# Altium PCB lipo battery.PcbDoc
Units mil, origin at the board's own origin, x right, y up, seen from the top; angles counter-clockwise.
Board outline 2000 x 2294.35 mil, 2 copper layers (Top Layer, Bottom Layer); 22 components, 10 nets, 56 pads, 11 vias.
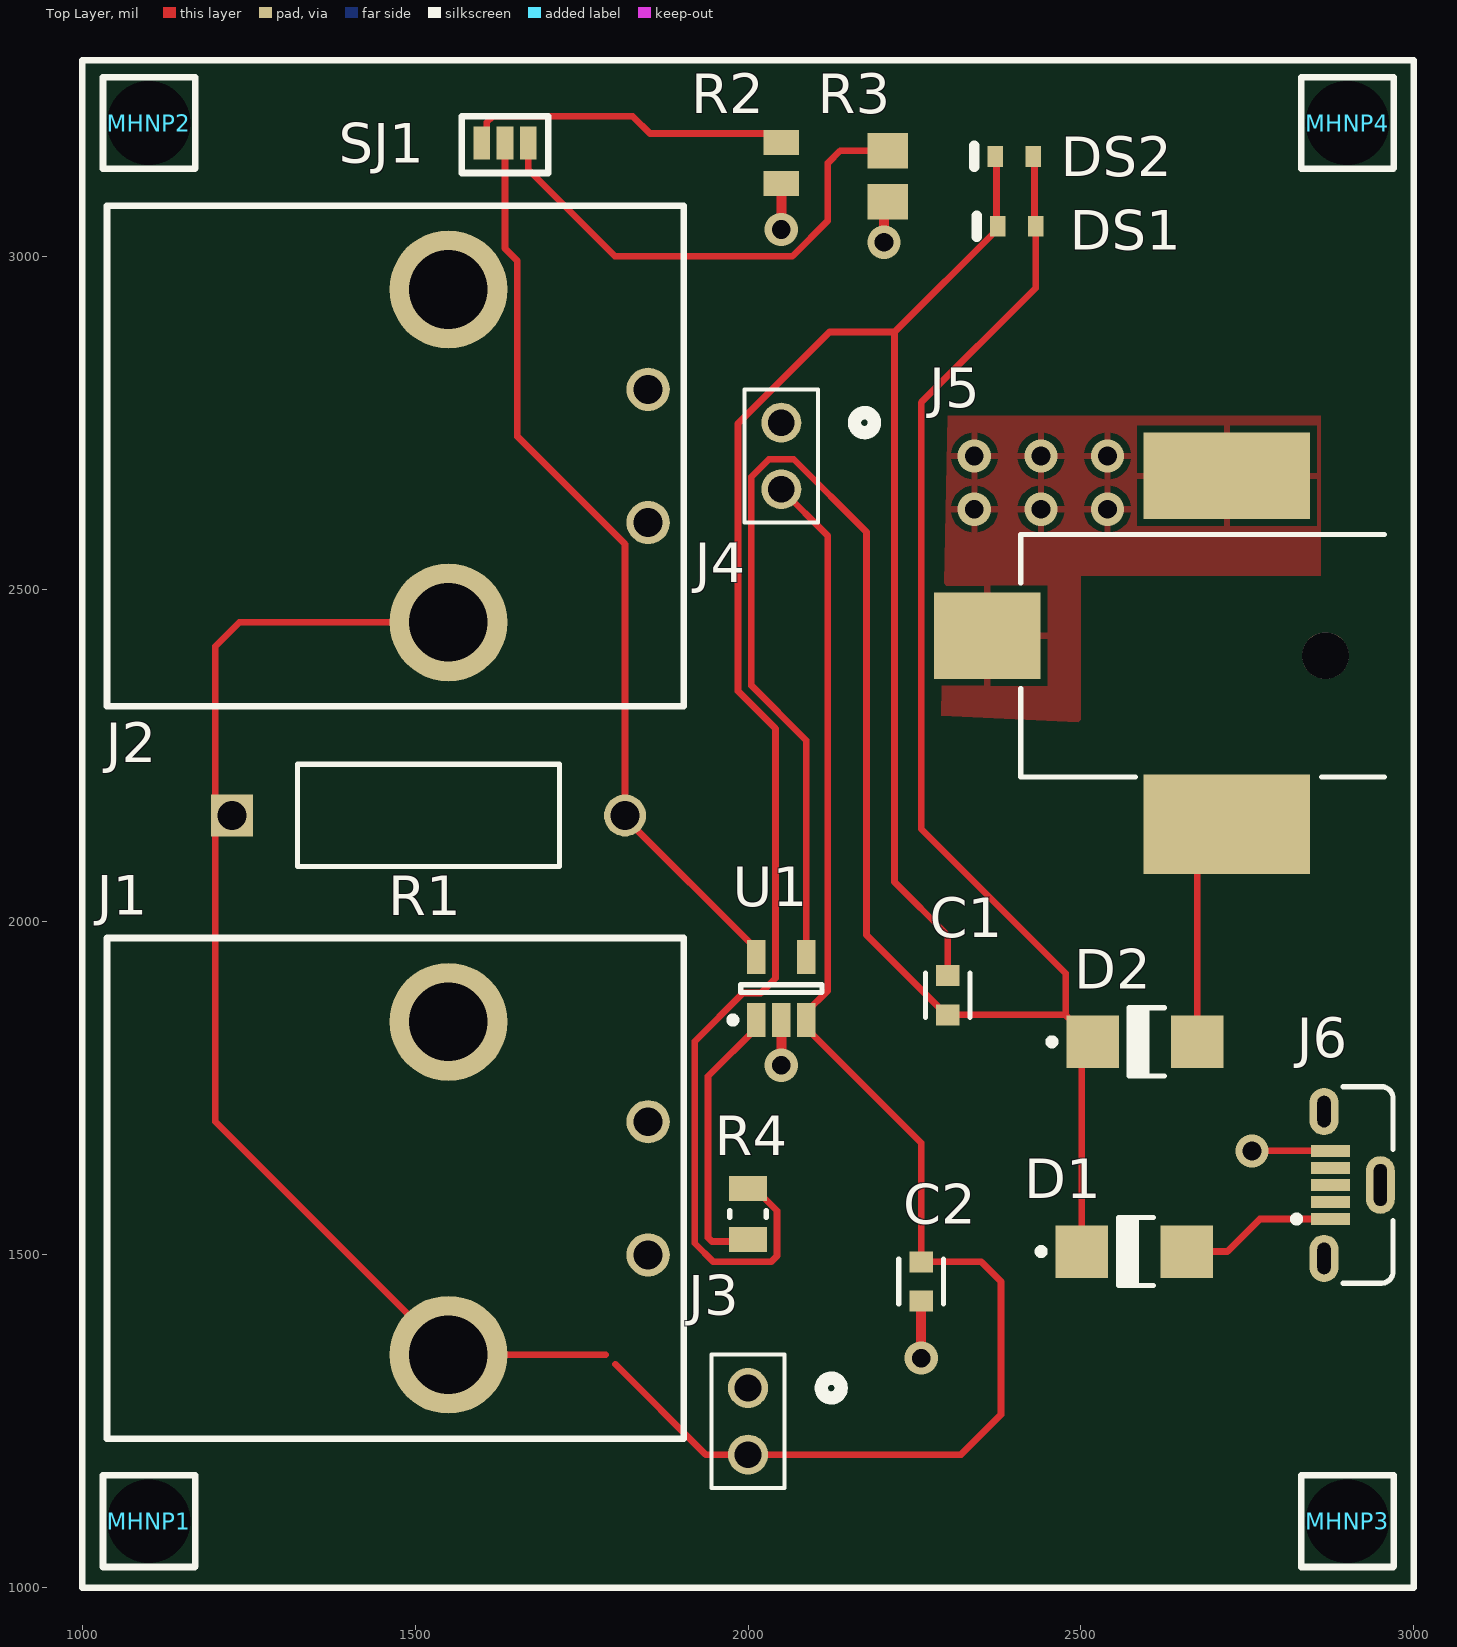
[diagram p0: Top Layer view]
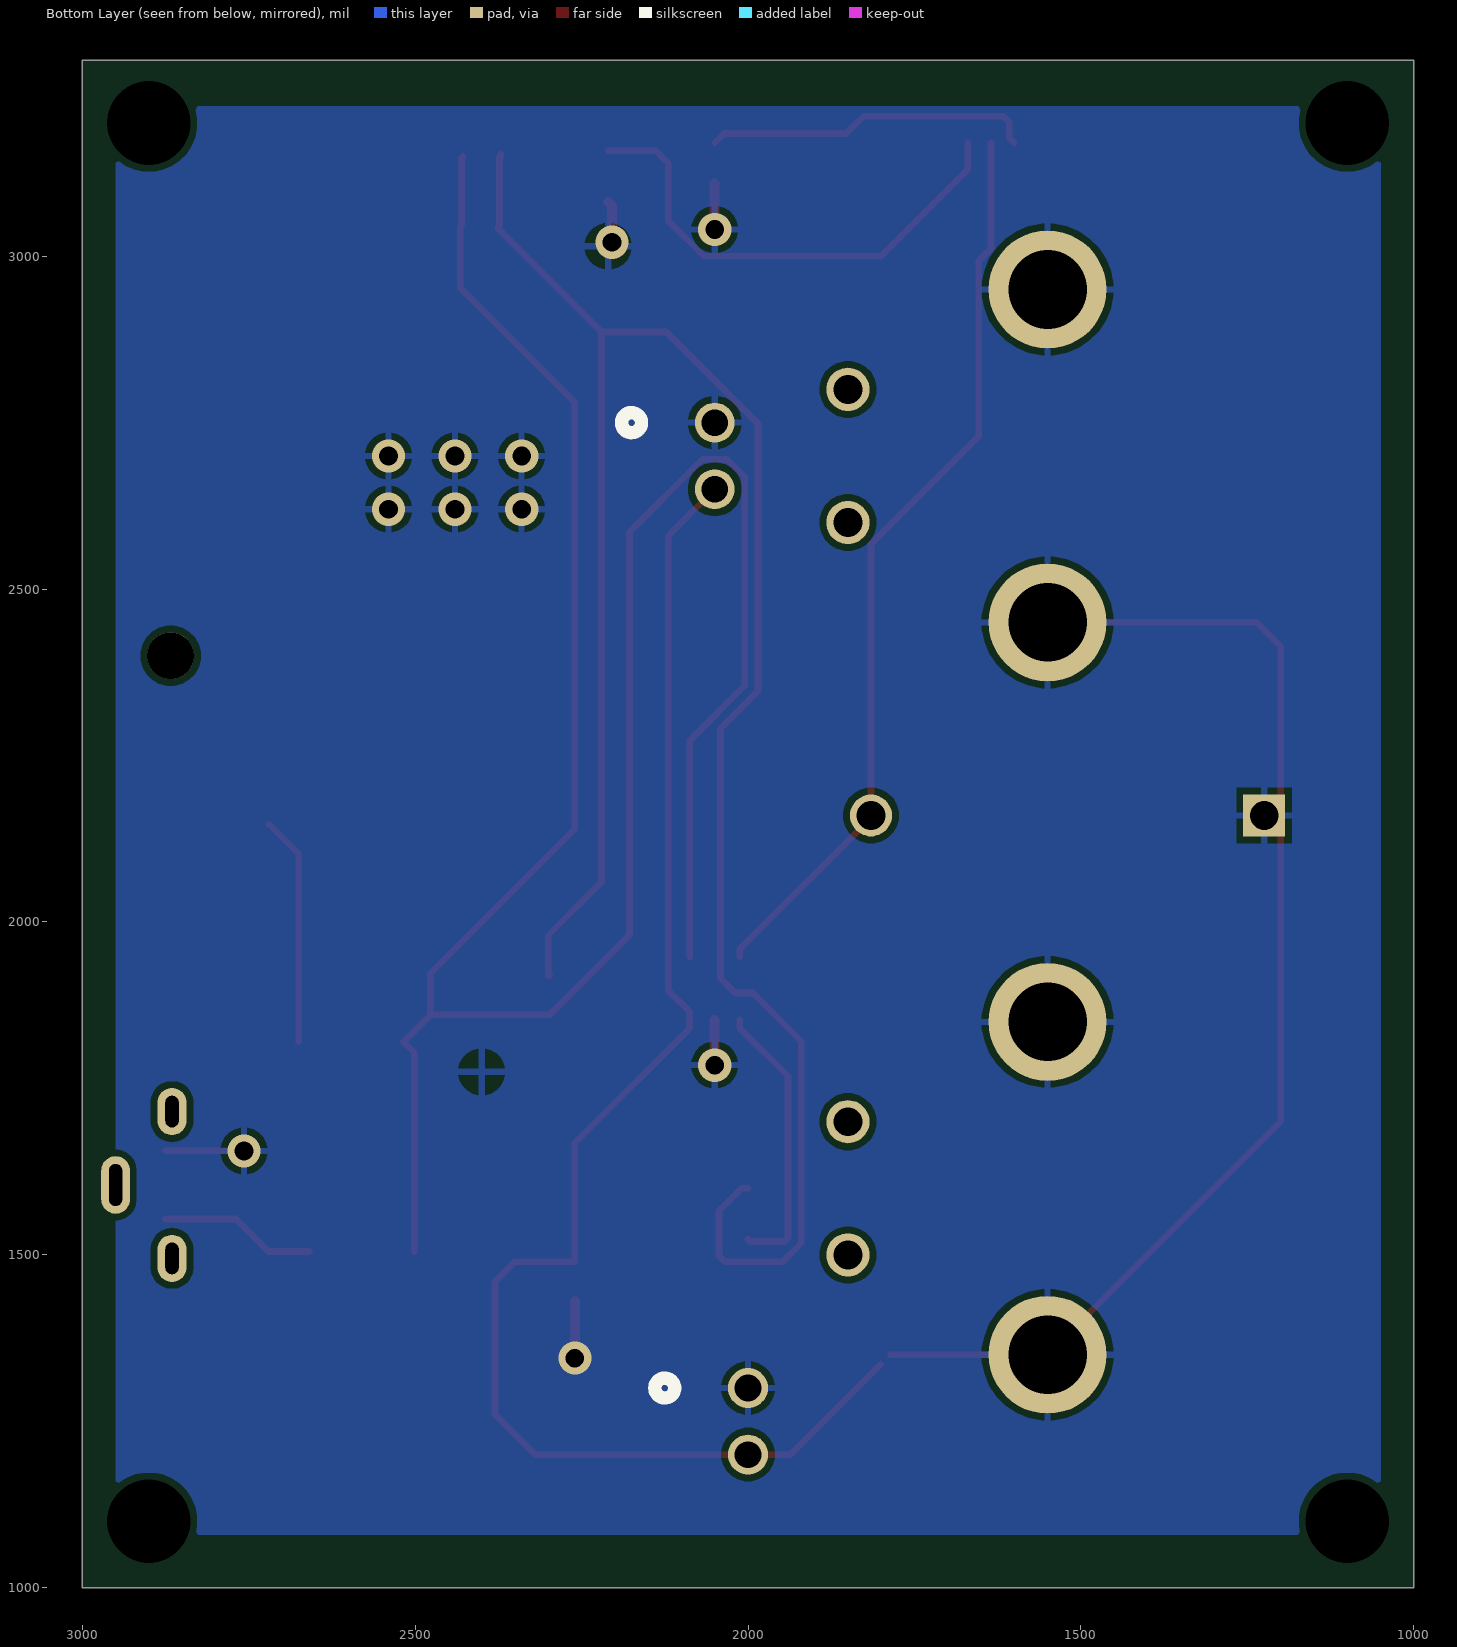
[diagram p1: Bottom Layer view, seen from below]

## Layer stack, top to bottom
Top Solder: solder mask 0.4, Solder Resist, Dk 3.5
Top Layer: signal copper 1.4
Dielectric 1: dielectric 12.6, FR-4, Dk 4.8
Bottom Layer: signal copper 1.4
Bottom Solder: solder mask 0.4, Solder Resist, Dk 3.5

## Board outline
1000,1000 1000,3294.35 3000,3294.35 3000,1000

## Design rules (kind name [scope] priority, off if disabled: settings)
Clearance [All] p1: gap=10 ignorepadtopadclearanceinfootprint=TRUE except(0: Arc-Hole Track-Hole SMDPad-Hole THPad-Hole Via-Hole Fill-Hole Poly-Hole Region-Hole Text-Hole)
PolygonConnect [All] p1: connectstyle=Relief reliefconductorwidth=10 reliefentries=4 polygonreliefangle="90 Angle" airgapwidth=10
RoutingVias [All] p1: holewidth=28 width=50 viastyle="Through Hole" minholewidth=28 minwidth=50 maxholewidth=28 maxwidth=50
SolderMaskExpansion [All] p1: expansion=4 istentingtop=FALSE
Width [All] p1: maxlimit=40 minlimit=10 preferedwidth=10
30 further rules are at their usual default settings.

## Classes and differential pairs
component class "lipo battery": C1 C2 D1 D2 DS1 DS2 J4 J5 J6 MHNP1 MHNP2 R2 R3 R4 SJ1 U1

## Components (designator, comment, footprint, x,y, rotation, side; value= is the part's Value field where it differs from the comment)
C1 "4.7uF" FP-CC0603-DA-MFG 2300,1890 r90 top value="4.7 uF"
C2 "4.7uF" FP-CC0603-DA-MFG 2260,1460 r270 top value="4.7 uF"
D1 "40V,1A" ONSC-SMA-2-403D-02_V 2580,1505 r0 top
D2 "40V,1A" ONSC-SMA-2-403D-02_V 2596.26,1820 r0 top
DS1 "RED" VISH-TLMS1000_V 2403.54,3045 r180 top
DS2 "RED" VISH-TLMS1000_V 2400,3150 r180 top
J1 "CONN HEADER R/A 2POS 5.08MM" 1-179276-2 1550,1850 r270 top locked (schematic designator J6)
J2 "CONN HEADER R/A 2POS 5.08MM" 1-179276-2 1550,2950 r270 top locked (schematic designator J5)
J3 "67997-402HLF" 2Pins_AMP 2000,1300 r180 top (schematic designator J4)
J4 "67997-402HLF" 2Pins_AMP 2050,2750 r180 top (schematic designator J3)
J5 "RASM722PTR13X" FP-RASM722PTR13X-MFG 2700,2400 r90 top locked (schematic designator J1)
J6 "Micro-USB B Receptacle" MOLX-105133-0001_V 2907.48,1605 r90 top (schematic designator J2)
MHNP1 "MOUNTING HOLE NON PLATED 3.2MM" MPHNP3P2MM 1100,1100 r90 top locked
MHNP2 "MOUNTING HOLE NON PLATED 3.2MM" MPHNP3P2MM 1100,3200 r90 top locked (schematic designator MHNP3)
MHNP3 "MOUNTING HOLE NON PLATED 3.2MM" MPHNP3P2MM 2900,1100 r90 top locked (schematic designator MHNP2)
MHNP4 "MOUNTING HOLE NON PLATED 3.2MM" MPHNP3P2MM 2900,3200 r90 top locked (schematic designator MHNP3)
R1 "PROG" VISH-A1-2_V2 1520,2160 r0 top (schematic designator R4)
R2 "2k" RESC2013X70X40LL20T20 2050,3140 r90 top
R3 "10k" RESC2013X70X40ML20T20 2210,3120 r90 top
R4 "330" FP-CRCW0805-e3-MFG 2000,1561.61 r90 top (schematic designator R1)
SJ1 "SJUMPER" SJUMPER 1635,3170 r0 top
U1 "charge controller" SOT-23-OT5_M 2050,1900 r90 top

## Footprints (in the part's own frame and the unit in brackets; to place one, negate y for a bottom-side part, rotate by r counter-clockwise, add the part's x,y. Pads: shape width x height; smd on the part's side, far side on the other; paste and mask are expansions set on the pad)
1-179276-2 [mm] "2_POS_HDR_X19MM_Y22MM"
  round 4.5 hole 3: 1(0,0) 1(12.7,0)
  round 1.65 hole 1.1: ""(3.81,7.62) ""(8.89,7.62)
  silkscreen extent -3.2,-13.03 15.9,8.98, body extent -3.19,-13.68 15.89,8.42, height 10.86
2Pins_AMP [mil]
  round 60 hole 40 paste-30 mask+0: 1(0,0) 2(0,100)
  silkscreen extent -140,-50 55,150
FP-CC0603-DA-MFG [mm]
  rect 0.8x0.9 smd paste+0 mask+0: 1(-0.75,0) 2(0.75,0)
  silkscreen extent -0.85,-0.85 0.85,0.85, body extent -1.35,-0.75 1.35,0.75, height 0.25
FP-CRCW0805-e3-MFG [mm]
  rect 0.95x1.45 smd paste+0 mask+0: 1(-0.975,0) 2(0.975,0)
  silkscreen extent -0.13,-0.7 0.13,0.7, body extent -1.55,-0.82 1.55,0.82, height 0.25
FP-RASM722PTR13X-MFG [mm]
  rect 3.3x4.06 smd paste+0 mask+0: 1(0.76,8.65)
  rect 3.81x6.35 smd paste+0 mask+0: 2(-6.43,-0.49)
  rect 3.3x6.35 smd paste+0 mask+0: 3(6.86,-0.49)
  round 1.78 hole 1.78 unplated paste-1000 mask+0: ""(0,-4.25)
  silkscreen extent -4.63,-6.5 4.63,7.38, body extent -8.43,-7.48 8.61,10.78, height 0.25
MOLX-105133-0001_V [mm] "Micro USB B, 5-Leads, Pitch 0.65mm"
  rect 0.45x1.5 smd: 1(-1.3,0.825) 2(-0.65,0.825) 3(0,0.825) 4(0.65,0.825) 5(1.3,0.825)
  oval 1.8x1.1 hole 0.5 slot 1.2 at 0 deg: 6(-2.8,1.075) 7(2.8,1.075)
  oval 2.2x1.1 hole 0.5 slot 1.6 at 0 deg: 8(0,-1.075)
  silkscreen extent -3.75,-1.56 3.75,2.25, body extent -4.02,-2.22 4,2.23, height 7.51
MPHNP3P2MM [mm] "MOUNTING HOLE NONE PLATED 3.2MM"
  round 1 hole 3.2: ""(0,0)
  silkscreen extent -1.75,-1.78 1.75,1.75
ONSC-SMA-2-403D-02_V [mm] "Molded, 2-Leads, Body 4.57x2.92mm"
  rect 2x2 smd: 1(-2,0) 2(2,0)
  silkscreen extent -3.67,-1.3 0.74,1.3, body extent -2.16,-1.3 2.16,1.3, height 2.2
RESC2013X70X40LL20T20 [mm] "Chip Resistor, 2-Leads, Body 2.00x1.25mm, IPC High Density"
  rect 0.95x1.35 smd: 1(-0.775,0) 2(0.775,0)
  body extent -1.1,-0.72 1.1,0.72, height 0.7
RESC2013X70X40ML20T20 [mm] "Chip Resistor, 2-Leads, Body 2.00x1.25mm, IPC Low Density"
  rect 1.35x1.55 smd: 1(-0.975,0) 2(0.975,0)
  body extent -1.1,-0.72 1.1,0.72, height 0.7
SJUMPER [mil]
  rect 25x50 smd: 1(-35,0) 2(0,0) 3(35,0)
  silkscreen extent -65,-45 65,40
SOT-23-OT5_M [mm] "SOT23, 5-Leads, Body 2.9x1.7mm, Pitch 0.95mm, Lead Span 2.8mm, IPC Low Density"
  rect 1.3x0.7 smd: 1(-1.2,0.95) 2(-1.2,0) 3(-1.2,-0.95) 4(1.2,-0.95) 5(1.2,0.95)
  silkscreen extent -1.32,-1.55 0.15,1.97, body extent -0.9,-1.55 0.9,1.55, height 1.45
VISH-A1-2_V2 [mm] "Through Hole, 2-Leads, Dia 3.9mm, Body Length 10mm, Pin Spacing 15mm"
  rect 1.6x1.6 hole 1.1: 1(-7.5,0)
  round 1.6 hole 1.1: 2(7.5,0)
  silkscreen extent -5,-1.95 5,1.95, body extent -7.91,-1.95 7.92,1.95, height 3.88
VISH-TLMS1000_V [mm] "SMD, 2-Leads, Body 0.8x1.6mm"
  rect 0.6x0.8 smd: 1(-0.725,0) 2(0.725,0)
  silkscreen extent 1.52,-0.4 1.52,0.4, body extent -0.8,-0.4 0.8,0.4, height 0.65

## Part data
C1 C2: library part CMP-03422-000495-1, "CAP CER 4.7UF 6.3V X5R 0603", Capacitance="4.7 uF", Manufacturer=YAGEO, Manufacturer Part Number=CC0603KRX5R5BB475, Package=CC0603-DA, Temperature="-55°C to +125°C", Temperature Characteristic=X5R, Temperature Coefficient=15%, Temperature Range High=+125°C, Temperature Range Low=-55°C, Tolerance=0.1, Voltage="6.3 V", Automotive=No, Category=Cap, ComponentLink2Description=Datasheet, ComponentLink2URL=http://www.yageo.com/documents/recent/UPY-GPHC_X7R_6.3V-to-50V_18.pdf, Device Class L1="Passive Components", Device Class L2=Capacitors, Device Class L3="Ceramic Capacitors", Digikey Description="CAP CER 4.7UF 6.3V X5R 0603", Footprint Url=http://www.yageo.com/exep/pages/download/literatures/UPY-C_GEN_24.pdf, Height=0.9mm, Lead Free=Yes, Material=Ceramic, Mouser Description="Multilayer Ceramic Capacitor, CC Series, 4.7 - F, - 10%, X5R, 6.3 V, 0603 [1608 Metric]", Octopart=https://octopart.com/cc0603krx5r5bb475-yageo-42244632, RoHS=TRUE, Voltage Rating="6.3 V"
D1 D2: library part CMP-1055-00320-1, "Schottky Power Rectifier, 2-Pin SMA, Pb-Free, Tape and Reel", Manufacturer="On Semiconductor", PartNumber=MBRA140T3G, ComponentLink1Description="Manufacturer URL", ComponentLink1URL=http://www.onsemi.com/, ComponentLink2Description=Datasheet, ComponentLink2URL=http://www.onsemi.cn/pub_link/Collateral/MBRA140T3-D.PDF, ComponentLink3Description="Package Specification", ComponentLink3URL=http://www.onsemi.com/pub_link/Collateral/403D-02.PDF, Configuration=Single, DatasheetVersion="Rev. 10", IFSM Max (A)=30, Mounting Technology="Surface Mount", PackageDescription="2-Pin Small Molded Package, J-Bend Lead, Body 2.605 x 4.315 mm", PackageReference=SMA-2-403D-02, PackageVersion="Rev. G, 07/2012", Packing="Tape and Reel", RoHS=TRUE
DS1 DS2: library part CMP-2000-07254-1, "Low Current LED, 40 mW, 1.8 V, -40 to 100 degC, 2-Pin SMD (0603), RoHS, Tape and Reel", Forward Current If=2mA, Forward Voltage=1.8V, LED Colour=Red, Manufacturer=Vishay, Package Description="2-Pin Surface Mount Device, Body 1.6 x 0.8 mm", Package Reference=TLMS1000, Automotive Qualification Standard=AEC-Q100, Bulb Size=1.6mmx0.8mm, Datasheet URL=https://datasheet.ciiva.com/5798/1698881-5798337.pdf, Datasheet Version="Rev. 1.7, 02/2011", LED Mounting=SMD, Lens Shape=Rectangular, Luminous Intensity=4mcd, Manufacturer URL=http://www.vishay.com/, Mounting Technology=SurfaceMount, MSL=MSL2-1year, Packaging=CutTape, Product Range=-, SVHC=ToBeAdvised, Viewing Angle=80°, Wavelength Typ=636nm
J1 J2: library part 1-179276-2, Manufacturer="TE Connectivity AMP Connectors", Supplier Part Number 1=7189696P, ComponentLink1Description="product url", ComponentLink1URL=https://www.digikey.com/en/products/detail/te-connectivity-amp-connectors/1-179276-2/664296, Manufacturer Part Number=1-179276-2, Supplier 1=Rs
J3 J4: "No Description Available", Mfr_Name="Amphenol ICC", RefDes=RefDes, Type=Type
J5: library part CMP-47995-000002-1, "CONN PWR JACK 2.1X5.5MM SOLDER", Case/Package=SMD/SMT, Color=Black, Current Rating=5A, Package Quantity=120, Connector Type=Jack, Contact Material="Copper Alloy", Contact Plating=Tin, Gender=Male, Housing Color=Black, Housing Material=Thermoplastic, Mount="Surface Mount", Shielding=Unshielded, Termination=Solder
J6: library part CMP-2000-05829-1, "Micro-USB B Receptacle, Vertical, -30 to 85 degC, 5-Pin SMD, RoHS, Tape and Reel", Color=Black, Current Rating=1.8A, Flammability Rating=UL94V-0, Manufacturer=Molex, Package Description="5-Pin Surface Mount Device, Pitch 0.65 mm", Package Reference=105133-0001, Package Version="Rev. C, 11/2015", Voltage - Max=30V, Voltage Rating=30VAC, Brand=Molex, Connector Type=MicroUSBTypeBReceptacle, Contact Material=CopperAlloy, Contact Plating=Gold, Datasheet URL=http://www.molex.com/webdocs/datasheets/pdf/en-us/1051330001_IO_CONNECTORS.pdf, Datasheet Version=03/2016, Factory Pack Quantity=6000, Gender=Receptacle, Manufacturer URL=http://www.molex.com/, Mounting Angle=Vertical, Mounting Style=SMD/SMT, Mounting Technology=SurfaceMount, Number of Ports=1, Package URL=http://www.molex.com/pdm_docs/sd/1051330001_sd.pdf, Packaging=Reel, PartNumber=105133-0001, Product=MicroUSBTypeBConnectors, Product Category=USBConnectors, RoHS=Details, Series=105133, Standard=USB, Termination Style=SolderTail
MHNP1 MHNP2 MHNP3 MHNP4: library part MTH3P2MM, "MOUNTING HOLE NON PLATED 3.2MM DRILL HOLE"
R1: library part CMP-1240-00001-1, "Power Metal Film Leaded Resistor, 62 KOhm +/-5%, 2 W, 2-Pin THD, RoHS, Ammo Pack", Manufacturer="Vishay Semiconductor", PartNumber=PR02000206202JA100, Power="2 W", Resistance="62 KOhm", Temperature Coefficient="+/-250 ppm/degC", Tolerance=+/-5%, ComponentLink1Description="Manufacturer URL", ComponentLink1URL=http://www.vishay.com/, ComponentLink2Description=Datasheet, ComponentLink2URL=http://www.vishay.com/docs/28729/28729.pdf, ComponentLink3Description="Package Specification", ComponentLink3URL=http://www.vishay.com/docs/28729/28729.pdf, DatasheetVersion=Jun-13, Mounting Technology="Through Hole", PackageDescription="2-Pin Axial Lead, Body 10 x 3.9 mm", Packing="Ammo Pack", RoHS=TRUE
R2: library part CMP-2001-00370-1, Manufacturer=Panasonic, Part Number=ERJ-6GEYJ202V
R3: library part CMP-2001-04376-1, Manufacturer=Panasonic, Part Number=ERJ-6ENF1002V
R4: library part CMP-2001-03823-2, "RES Thick Film, 330Ω, 1%, 0.125W, 100ppm/°C, 0805", Case Code (Imperial)=0805, Case Code (Metric)=2012, Max Operating Temperature=155°C, Max Power Dissipation=125mW, Min Operating Temperature=-55°C, Package Quantity=10, Resistance=330R, Temperature Coefficient=100ppm/°C, Tolerance=1%, Voltage Rating=150V, Case/Package=0805, Composition="Thick Film", Contact Plating=Tin, Depth=1.25mm, Features="Automotive AEC-Q200", Height=0.02inch, Lead Free="Lead Free", Length=2mm, Military Standard=Not, Mount="Surface Mount", Number of Terminations=2, Packaging="Tape and Reel", Power Rating=125mW, Termination=SMD/SMT, Voltage Rating (DC)=150V, Weight=0.000194oz, Width=0.049inch
SJ1: "solder jumper 3 pads and pins"
U1: library part CMP-0133-00139-1, "Simple, Miniature Single-Cell, Fully Integrated Li-Ion/Li-Polymer Charge Management Controller, 4.2V, 5-Pin SOT-23, Industrial Temperature, Tape and Reel", Code_IPC=SOT23-5, DatasheetVersion="revB, Sep-2007", PackageDescription="5-Lead Plastic Small Outline Transistor (OT) [SOT-23]", PackageReference=SOT-23-OT5, PackageVersion="revBB, Aug-2009"

## Via types
v1: diameter 50, hole 28, Top Layer to Bottom Layer, 11 vias

## Nets (pads, with @x,y where several pads share a name; then routed paths per layer and width w, separated by ;. In a path a pad name is that pad's centre, name@x,y a point inside that pad or via, vN(x,y) a via of type N, cw(c..) or ccw(c..) an arc to the next point about the centre after c; other vN are vias at no path point)
GND: C2.2 J1.1 J2.1 J3.1 J4.1 J5.1 J5.3 J6.5 R1.1 R2.1 R3.1 U1.2 | length 2214.3
  Top Layer w10: J2.1@1550,2450 1235.86,2450 1200,2414.14 1200,1700 1550,1350 1786.36,1350 ; v1(2757,1656) 2757.18,1656.18 J6.5
  Top Layer w15: v1(2050,1785) U1.2 ; v1(2050,3040) R2.1 ; v1(2204.22,3020.78) 2204.22,3075.83 R3.1 ; v1(2260,1345) C2.2
  other v1: 2340,2620 2440,2620 2540,2620 2340,2700 2440,2700 2540,2700
NetC1_1: C1.1 D1.1 D2.1 DS1.1 DS2.1 U1.4 | length 3769.8
  Top Layer w10: U1.4 2087.4,2272.65 2005,2355.05 2005,2668.64 2031.36,2695 2068.64,2695 2177.96,2585.68 2177.96,1980.54 2298.03,1860.47 C1.1 2477.05,1860.47 ; DS2.1 2430.31,3148.23 2430.31,3046.77 DS1.1 2432.09,2952.09 2260,2780 2260,2140 2477.05,1922.95 2477.05,1860.47 ; D1.1 2501.26,1803.74 D2.1 2477.05,1860.47
NetC1_2: C1.2 DS1.2 DS2.2 R4.2 | length 3207.8
  Top Layer w10: R4.2 2009.84,1600 2043.54,1566.3 2043.54,1498.31 2034.76,1489.53 1948.05,1489.53 1920,1517.57 1920,1820.74 1992.61,1893.35 2019.28,1893.35 2041.38,1915.44 2041.38,2290.39 1985,2346.76 1985,2748.64 2122.42,2886.06 2220,2886.06 ; C1.2@2298.03,1919.53 C1.2 2300,1980 2220,2060 2220,2886.06 ; DS2.2@2371.46,3153.94 DS2.2 2373.23,3148.23 2373.23,3046.77 DS1.2 ; DS1.2@2375,3041.06 2220,2886.06
NetC2_1: C2.1 J3.2 J4.2 U1.3 | length 2267.3
  Top Layer w10: 1800.5,1335.86 1936.36,1200 J3.2 2320,1200 2380,1260 2380,1460 2350.47,1489.53 C2.1 2260,1668.35 2087.4,1840.94 U1.3 2087.4,1864.57 2120,1897.17 2120,2580 J4.2
NetD1_2: D1.2 J6.1 | length 236.5
  Top Layer w10: D1.2 2720,1505 2768.82,1553.82 J6.1
NetD2_2: D2.2 J5.2 | length 346.2
  Top Layer w10: D2.2 2675,2102.56 J5.2 J5.2@2720,2146.14
NetR1_1: R4.1 U1.1 | length 420.7
  Top Layer w10: R4.1 1996.77,1520 1945.86,1520 1940,1525.86 1940,1768.35 2012.6,1840.94 U1.1
NetR2_2: R2.2 SJ1.1 | length 496.8
  Top Layer w10: SJ1.1 1607.5,3177.5 1607.5,3201.21 1616.29,3210 1826.96,3210 1852.75,3184.21 2036.3,3184.21 R2.2
NetR3_2: R3.2 SJ1.3 | length 750.2
  Top Layer w10: SJ1.3 1670,3130 1800,3000 2066.57,3000 2120,3053.43 2120,3140 2138.39,3158.39 R3.2
NetR4_2: R1.2 SJ1.2 U1.5 | length 1379.2
  Top Layer w10: SJ1.2 1635,3011.49 1653.58,2992.91 1653.58,2729.27 1815.28,2567.58 R1.2 1815.28,2156.38 2012.6,1959.06 U1.5
pads on no net: J1. J2. J5. J6.2 J6.3 J6.4 J6.6 J6.7 J6.8 MHNP1. MHNP2. MHNP3. MHNP4.

## Polygon pours and split planes (outlines as drawn)
GND on Bottom Layer "GND" (solid, pour order 1): 1050,3225 2950,3225 2950,1080 1050,1080
GND on Top Layer "GND" (solid, pour order 3): 2860,2760 2860,2520 2500,2520 2500,2300 2290,2310 2300,2760

## Silkscreen, mask and mechanical layers (free items; w line width, h text height)
Top Overlay:
  the board outline again, w10